# EAGLE board RFM69 (EAGLE 6.6.0)
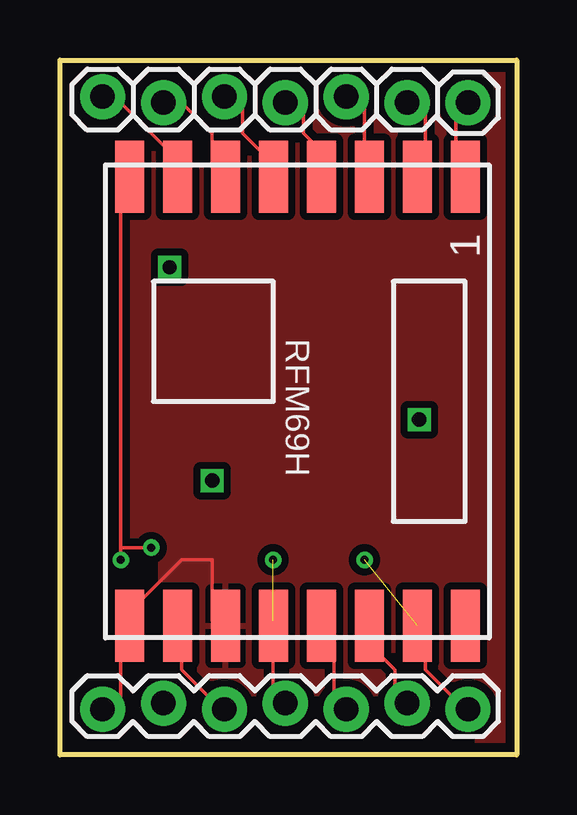
[diagram p0: board, top side]
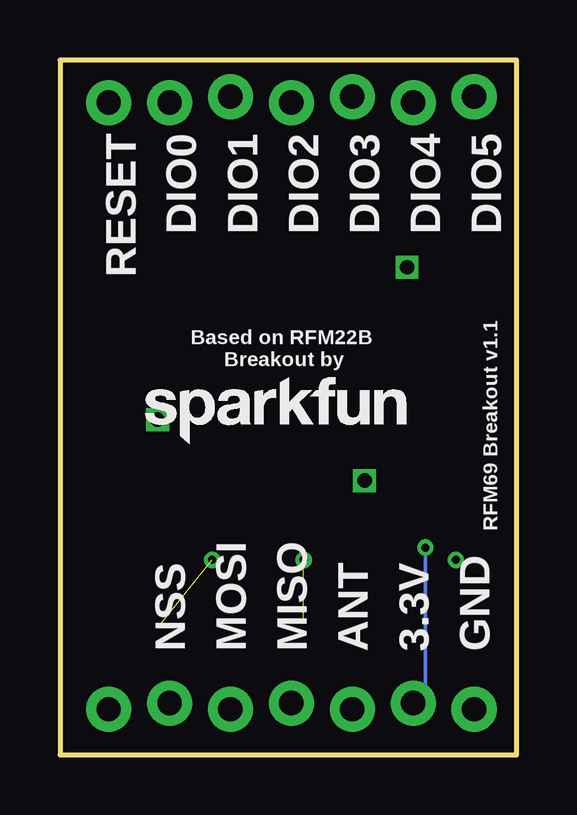
[diagram p1: board, bottom side, seen from below]

Size 19.05 x 28.96 mm. Coordinates in mm from the lower left corner, seen from the top.
Outline: 0,0 0,28.96 19.05,28.96 19.05,0 0,0
Copper layers (1*16): Top 0.0356mm / dielectric 1.5011mm / Bottom 0.0356mm
Design rules "LaenPCBOrder": minimum track width 6mil, minimum drill 13mil, track to track 6mil, track to pad 6mil, pad to pad 6mil, via to via 6mil, smd to smd 6mil, copper to edge 15mil, drill to drill 6mil, minimum pad ring 7mil, minimum via ring 7mil, stop-mask expansion 3mil, vias tented up to drill 0mil, thermal gap 10mil

## Footprints (pad centres in the part's own frame; a part is rotated, then mirrored left to right if it is on the bottom)
1X01 = drill 1.016 pad 1.88: 1 0,0
1X06_LOCK = drill 1.016 pad 1.88: 1 0,0; 2 2.54,-0.254; 3 5.08,0; 4 7.62,-0.254; 5 10.16,0; 6 12.7,-0.254
1X07_LOCK = drill 1.016 pad 1.88: 1 0,0.127; 2 2.54,-0.127; 3 5.08,0.127; 4 7.62,-0.127; 5 10.16,0.127; 6 12.7,-0.127; 7 15.24,0.127
RFM69W-XXXS2 = smd 3 x 1.2: 1 -9.35,7; 2 -9.35,5; 3 -9.35,3; 4 -9.35,1; 5 -9.35,-1; 6 -9.35,-3; 7 -9.35,-5; 8 -9.35,-7; 9 9.35,-7; 10 9.35,-5; 11 9.35,-3; 12 9.35,-1; 13 9.35,1; 14 9.35,3; 15 9.35,5; 16 9.35,7

## Placement (x,y rotation side)
JP2  RESET  [1X01]  17.02,27.18 0 top
JP3  GPIO  [1X06_LOCK]  1.78,27.43 0 top
JP4  SPI  [1X07_LOCK]  17.02,2.03 180 top
LOGO  [SFE_LOGO_NAME_.1]  16,12.45 0 bottom
U1  RFM69HW  [RFM69W-XXXS2]  9.91,14.73 270 top

## Library data of the parts
JP2-JP4 = SparkFun-Connectors
LOGO = SparkFun-Aesthetics
U1 = SparkFun-RF

## Nets
3.3V: JP4.6 U1.8
ANT: JP4.5 U1.10
DIO0: JP3.6 U1.2
DIO1: JP3.5 U1.3
DIO2: JP3.4 U1.4
DIO3: JP3.3 U1.5
DIO4: JP3.2 U1.6
DIO5: JP3.1 U1.7
GND: JP4.7 U1.9 U1.11
MISO: JP4.3 U1.13
MOSI: JP4.2 U1.14
NSS: JP4.1 U1.15
RESET: JP2.1 U1.1
SCK: JP4.4 U1.12

## Tracks (layer width: path | path; a pad name or v marks a point on that pad's centre or on a via)
3.3V  (via drill 0.33)
  Top 0.152: v2.54,8.13 2.54,8.64 | 2.54,8.64 2.54,23.37 U1.8 | 2.54,8.64 v3.81,8.64
  Bottom 0.152: v3.81,8.64 3.81,2.29 JP4.6
ANT
  Top 0.152: U1.10 5.08,4.83 5.08,3.56 6.35,2.29 JP4.5
DIO0
  Top 0.152: U1.2 15.24,24.64 15.24,27.18 JP3.6
DIO1
  Top 0.152: U1.3 12.7,24.64 12.7,27.18 JP3.5
DIO2
  Top 0.152: U1.4 11.43,24.64 10.16,25.91 10.16,27.18 JP3.4
DIO3
  Top 0.152: U1.5 8.89,24.64 7.62,25.91 7.62,27.18 JP3.3
DIO4
  Top 0.152: U1.6 6.35,24.64 6.35,25.91 5.08,27.18 JP3.2
DIO5
  Top 0.152: U1.7 5.08,24.64 2.54,27.18 JP3.1
GND
  Top 0.152: 2.54,4.32 U1.9 | U1.9 2.54,5.59 5.08,8.13 6.35,8.13 6.35,5.59 U1.11 | JP4.7 2.54,2.29 2.54,4.83 U1.9
  pour Top (isolate 0.305): 4.19,8.13 4.19,3.3 6.35,3.3 6.35,0 19.05,0 19.05,28.96 0,28.96 0,8.13
  pour Bottom (isolate 0.305): 4.19,8.13 4.19,3.3 6.35,3.3 6.35,0 19.05,0 19.05,28.96 0,28.96 0,8.13
MISO
  Top 0.152: 11.43,5.59 U1.13 | 11.43,4.83 U1.13 | 11.43,4.83 11.43,2.29 JP4.3 | 11.43,4.83 U1.13
MOSI
  Top 0.152: 12.7,4.32 U1.14 12.7,4.83 13.97,3.56 13.97,2.29 JP4.2
N$1  (via drill 0.6)
  other vias: 4.57,20.32
N$2  (via drill 0.6)
  other vias: 14.99,13.97
N$3  (via drill 0.6)
  other vias: 6.35,11.43
NSS  (via drill 0.33)  (1 unrouted)
  Top 0.152: 15.24,5.59 U1.15 | 15.24,4.83 U1.15 | 15.24,4.83 15.24,3.56 16.51,2.29 JP4.1 | 15.24,4.83 U1.15
  other vias: 12.7,8.13
RESET
  Top 0.152: U1.1 16.51,24.64 16.51,27.18 JP2.1
SCK  (via drill 0.33)  (1 unrouted)
  Top 0.152: 8.89,5.59 U1.12 8.89,4.83 8.89,2.29 JP4.4
  other vias: 8.89,8.13

## Text on the board
tPlace: RFM69H
bPlace: DIO5 | DIO4 | DIO3 | DIO2 | DIO1 | DIO0 | RESET | Based on RFM22B / Breakout by | RFM69 Breakout v1.1 | GND | 3.3V | ANT | MISO | MOSI | NSS